# Altium PCB Universal JTAG Interface.PcbDoc
Units mm, origin at the board's own origin, x right, y up, seen from the top; angles counter-clockwise.
Board outline 60 x 39.3 mm, 2 copper layers (Top Layer, Bottom Layer); 81 components, 60 nets, 244 pads, 77 vias.
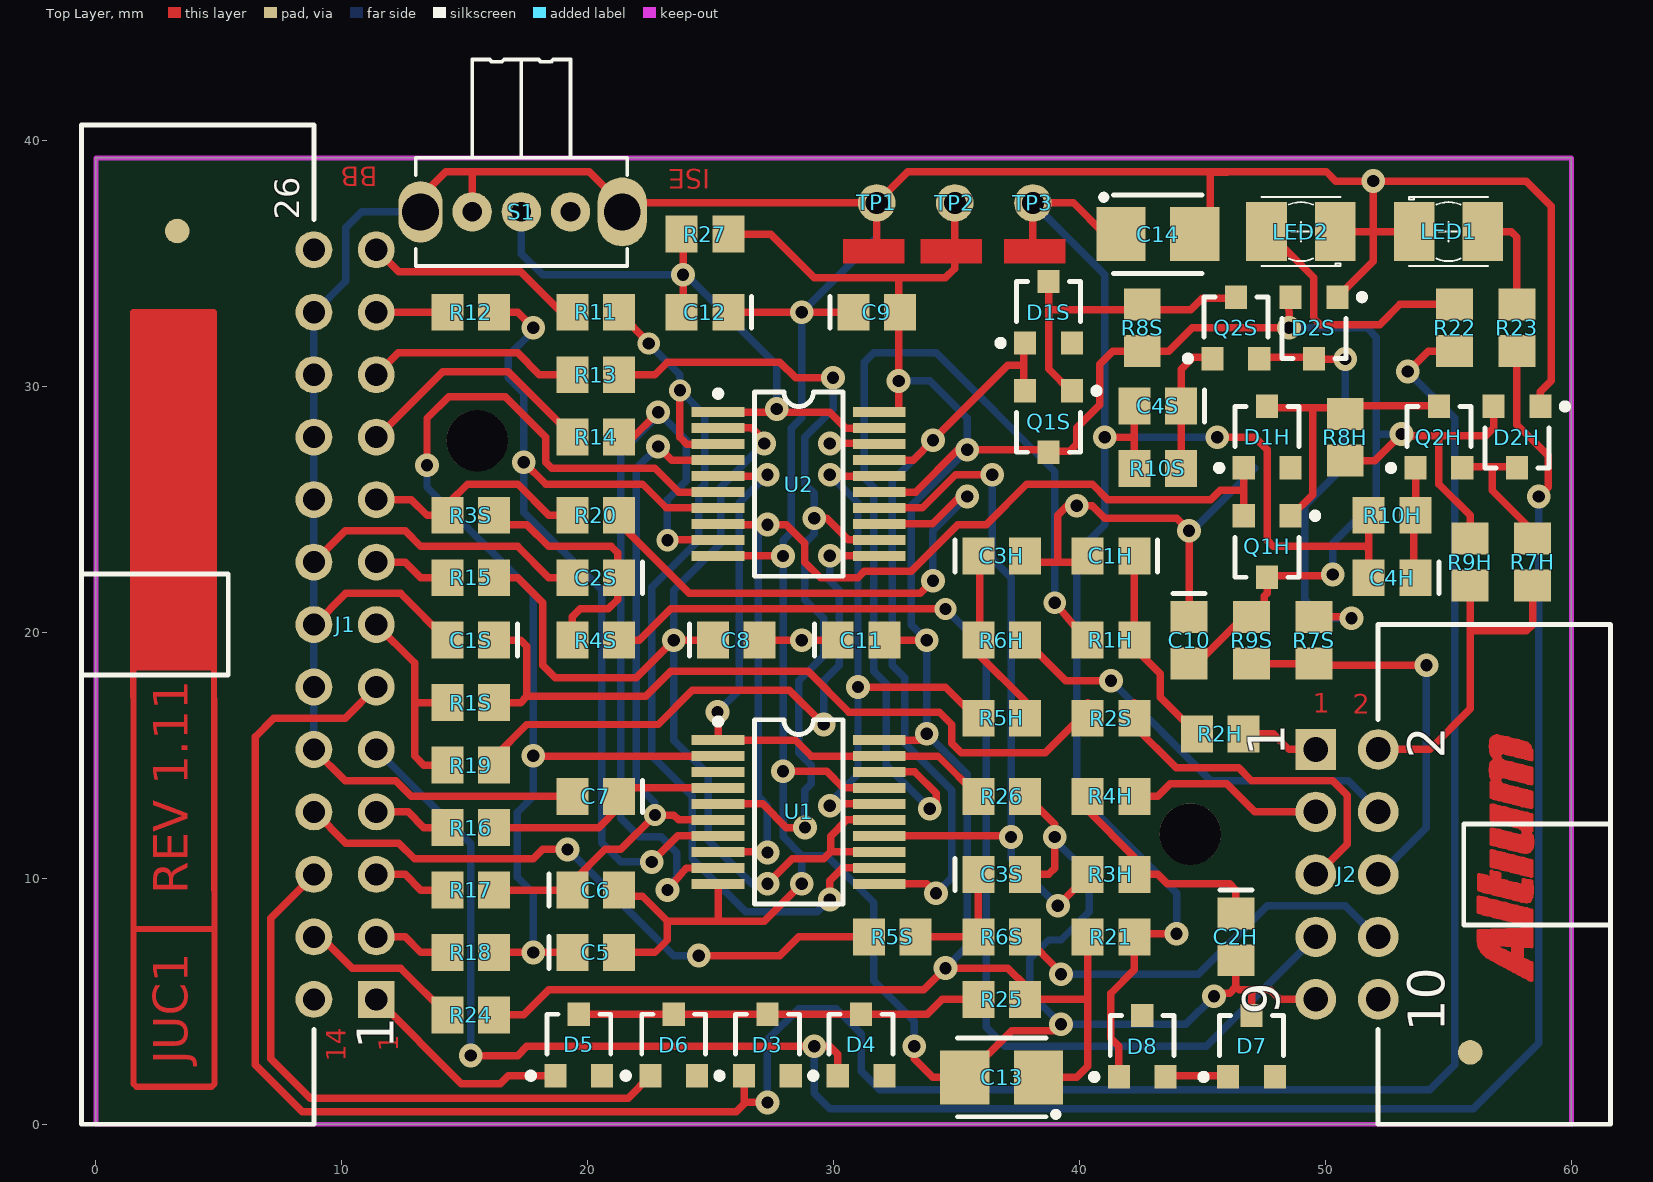
[diagram p0: Top Layer view]
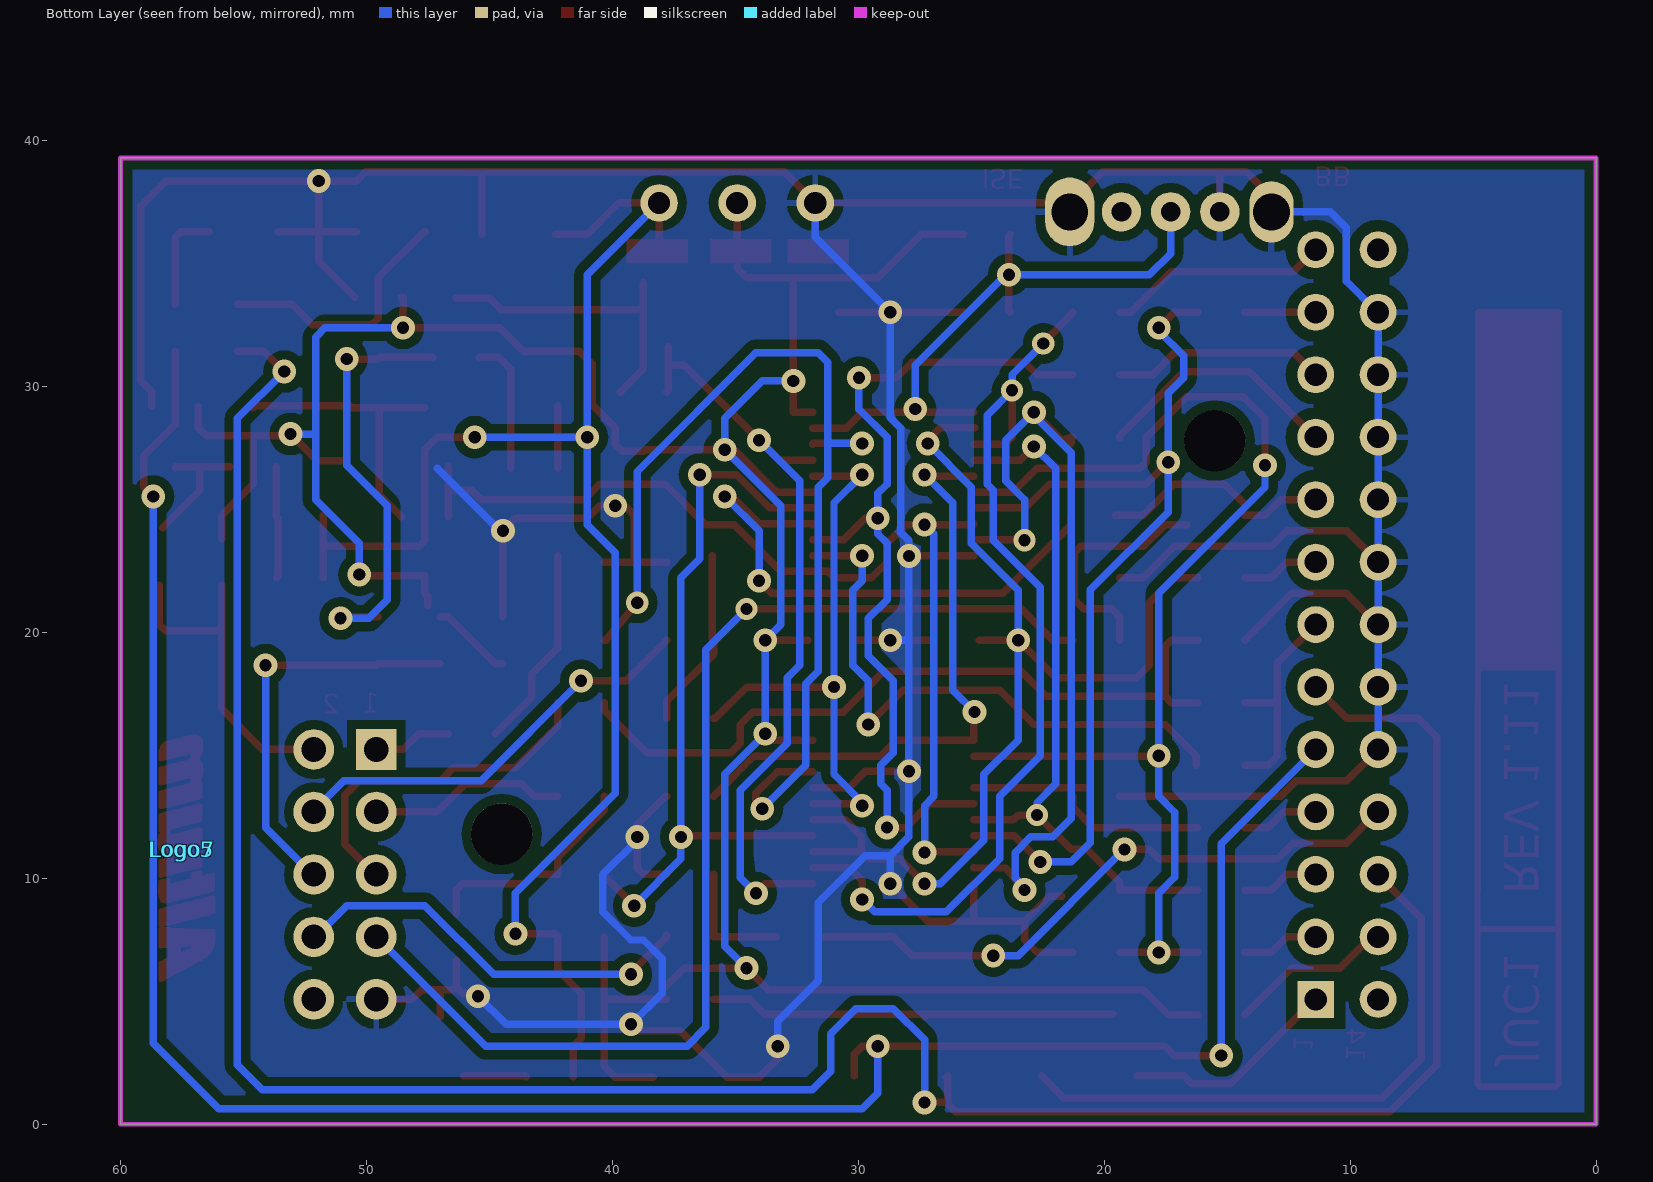
[diagram p1: Bottom Layer view, seen from below]

## Layer stack, top to bottom
Top Solder: solder mask 0.0102, Solder Resist, Dk 3.5
Top Layer: signal copper 0.0356
Dielectric1: dielectric 0.32, FR-4, Dk 4.8
Bottom Layer: signal copper 0.0356
Bottom Solder: solder mask 0.0102, Solder Resist, Dk 3.5

## Board outline
0,0 60,0 60,39.3 0,39.3

## Design rules (kind name [scope] priority, off if disabled: settings)
Clearance "Polygon Clearance" [InPolygon] p1: gap=0.381 ignorepadtopadclearanceinfootprint=FALSE except(0: Arc-Hole Track-Hole SMDPad-Hole THPad-Hole Via-Hole Fill-Hole Poly-Hole Region-Hole Text-Hole)
Clearance "Via-Via Clearance" [IsVia vs IsVia] p2: gap=0.3 ignorepadtopadclearanceinfootprint=FALSE except(0: Arc-Hole Track-Hole SMDPad-Hole THPad-Hole Via-Hole Fill-Hole Poly-Hole Region-Hole Text-Hole)
Clearance "Via-SMD Pad Clearance" [IsVia vs IsPad And OnTopLayer] p3: gap=0.254 ignorepadtopadclearanceinfootprint=FALSE except(0: Arc-Hole Track-Hole SMDPad-Hole THPad-Hole Via-Hole Fill-Hole Poly-Hole Region-Hole Text-Hole)
Clearance "Via-Pad Clearance" [IsVia vs IsPad] p4: gap=0.3 ignorepadtopadclearanceinfootprint=FALSE except(0: Arc-Hole Track-Hole SMDPad-Hole THPad-Hole Via-Hole Fill-Hole Poly-Hole Region-Hole Text-Hole)
Clearance "IC Pad-Pad Clearance" [HasFootprint('SOP65P780-20') vs HasFootprint('SOP65P780-20')] p5: gap=0.203 ignorepadtopadclearanceinfootprint=FALSE except(0: Arc-Hole Track-Hole SMDPad-Hole THPad-Hole Via-Hole Fill-Hole Poly-Hole Region-Hole Text-Hole)
Clearance "General Clearance" [All] p6: gap=0.254 ignorepadtopadclearanceinfootprint=FALSE except(0: Arc-Hole Track-Hole SMDPad-Hole THPad-Hole Via-Hole Fill-Hole Poly-Hole Region-Hole Text-Hole)
ComponentClearance ComponentClearance_General [Not InComponent('Logo5') && Not InComponent('Logo7') vs Not InComponent('Logo5') && Not InComponent('Logo7')] p1: gap=0.254 collisioncheckmode=3 verticalgap=0.254 showdistances=FALSE
ComponentClearance ComponentClearance_Default [All] p2 off: gap=0.254 collisioncheckmode=3 verticalgap=0.254 showdistances=FALSE
FabricationTestPointUsage TestPointUsage [All] p1 off: valid=0 allowmultiple=FALSE
FabricationTestpoint Testpoint [All] p1 off: side=3 testpointundercomponent=TRUE minsize=1.016 maxsize=2.54 preferedsize=1.524 minholesize=0 maxholesize=1.016 preferedholesize=0.813 testpointgrid=0.025 allowsidetop=TRUE allowsidebottom=TRUE usegrid=TRUE gridtolerance=0
HoleSize [All] p1: absolutevalues=TRUE maxlimit=3.2 minlimit=0.4 maxpercent=80.000 minpercent=20.000
PolygonConnect [All] p1: connectstyle=Relief reliefconductorwidth=0.254 reliefentries=4 polygonreliefangle="90 Angle" airgapwidth=0.254
RoutingVias [All] p1: holewidth=0.483 width=0.965 viastyle="Through Hole" minholewidth=0.3 minwidth=0.6 maxholewidth=0.711 maxwidth=1.27
SMDNeckDown [All] p1: percent=90.000
SilkToSolderMaskClearance SilkscreenOverComponentPads [IsPad] p1: minsilkscreentomaskgap=0.254 clearancetoexposedcopper=TRUE
SolderMaskExpansion [All] p1: expansion=0.102
Width "Logo Component Track Width" [InComponent('Logo5') Or InComponent('Logo7')] p1: maxlimit=2.54 minlimit=0.127 preferedwidth=0.254
Width "Polygon Width" [InPolygon] p2: maxlimit=0.508 minlimit=0.203 preferedwidth=0.254
Width [All] p3: maxlimit=1.27 minlimit=0.254 preferedwidth=0.305 minimp=50.000000 maximp=50.000000 favimp=50.000000
25 further rules are at their usual default settings.

## Classes and differential pairs
channel class "JTAG Interface": H S
component class S: C1S C2S C3S C4S D1S D2S Q1S Q2S R1S R2S R3S R4S R5S R6S R7S R8S R9S R10S
component class "Universal JTAG Interface": C5 C6 C7 C8 C9 C10 C11 C12 C13 C14 D3 D4 D5 D6 D7 D8 J1 J2 LED1 LED2 R11 R12 R13 R14 R15 R16 R17 R18 R19 R20 R21 R22 R23 R24 R25 R26 R27 S1 TP1 TP2 TP3 U1 U2
component class H: C1H C2H C3H C4H D1H D2H Q1H Q2H R1H R2H R3H R4H R5H R6H R7H R8H R9H R10H

## Components (designator, comment, footprint, x,y, rotation, side; value= is the part's Value field where it differs from the comment)
C1H "47pF 50V" CAPC2012 41.275,23.114 r180 top (schematic designator C1)
C1S "47pF 50V" CAPC2012 15.24,19.685 r180 top (schematic designator C1)
C2H "47pF 50V" CAPC2012 46.355,7.62 r270 top (schematic designator C2)
C2S "47pF 50V" CAPC2012 20.32,22.225 r180 top (schematic designator C2)
C3H "47pF 50V" CAPC2012 36.83,23.114 r0 top (schematic designator C3)
C3S "47pF 50V" CAPC2012 36.83,10.16 r0 top (schematic designator C3)
C4H "47pF 50V" CAPC2012 52.705,22.225 r180 top (schematic designator C4)
C4S "47pF 50V" CAPC2012 43.18,29.21 r180 top (schematic designator C4)
C5 "47pF 50V" CAPC2012 20.32,6.985 r0 top
C6 "47pF 50V" CAPC2012 20.32,9.525 r0 top
C7 "47pF 50V" CAPC2012 20.32,13.335 r180 top
C8 "47pF 50V" CAPC2012 26.035,19.685 r0 top
C9 "10nF 50V" CAPC2012 31.75,33.02 r0 top
C10 "10nF 50V" CAPC2012 44.45,19.685 r270 top
C11 "10nF 50V" CAPC2012 31.115,19.685 r0 top
C12 "10nF 50V" CAPC2012 24.765,33.02 r180 top
C13 "10uF 16V" CAPC3528 36.83,1.905 r180 top
C14 "10uF 16V" CAPC3528 43.18,36.195 r0 top
D1H "200mA 30V" SOT95P230-3 47.625,27.94 r0 top (schematic designator D1)
D1S "200mA 30V" SOT95P230-3 38.735,33.02 r0 top (schematic designator D1)
D2H "215mA 85V" SOT95P230-3 57.785,27.94 r180 top (schematic designator D2)
D2S "215mA 85V" SOT95P230-3 49.53,32.385 r180 top (schematic designator D2)
D3 "200mA 30V" SOT95P230-3 27.305,3.225 r0 top
D4 "200mA 30V" SOT95P230-3 31.115,3.225 r0 top
D5 "200mA 30V" SOT95P230-3 19.635,3.225 r0 top
D6 "200mA 30V" SOT95P230-3 23.495,3.225 r0 top
D7 "200mA 30V" SOT95P230-3 46.99,3.175 r0 top
D8 "215mA 85V" SOT95P230-3 42.545,3.175 r0 top
J1 "2x13 RA HEADER" HDR2X13_RA_CENTRONICS 8.86,20.32 r90 top locked
J2 "2x5 RA HEADER" 918510x323 52.14,10.16 r270 top locked
LED1 "ORANGE" LED3528 55,36.3 r180 top locked
LED2 "ORANGE" LED3528 49,36.3 r0 top
Logo5 "" "Altium Logo Small Bottom"#1 57.534,11.167 r270 bottom
Logo7 "" "Altium Logo Small Bottom"#2 57.495,11.167 r270 bottom
Q1H "TRAN-NPN-75V-40V-6V-SOT23" SOT95P230-3 47.625,23.495 r180 top (schematic designator Q1)
Q1S "TRAN-NPN-75V-40V-6V-SOT23" SOT95P230-3 38.735,28.575 r180 top (schematic designator Q1)
Q2H "TRAN-NPN-75V-40V-6V-SOT23" SOT95P230-3 54.61,27.94 r0 top (schematic designator Q2)
Q2S "TRAN-NPN-75V-40V-6V-SOT23" SOT95P230-3 46.355,32.385 r0 top (schematic designator Q2)
R1H "47R 5%" RESC2012 41.275,19.685 r0 top (schematic designator R1)
R1S "47R 5%" RESC2012 15.24,17.145 r0 top (schematic designator R1)
R2H "47R 5%" RESC2012 45.72,15.875 r0 top (schematic designator R2)
R2S "47R 5%" RESC2012 41.275,16.51 r0 top (schematic designator R2)
R3H "47R 5%" RESC2012 41.275,10.16 r0 top (schematic designator R3)
R3S "47R 5%" RESC2012 15.24,24.765 r0 top (schematic designator R3)
R4H "47R 5%" RESC2012 41.275,13.335 r0 top (schematic designator R4)
R4S "47R 5%" RESC2012 20.32,19.685 r0 top (schematic designator R4)
R5H "47R 5%" RESC2012 36.83,16.51 r0 top (schematic designator R5)
R5S "47R 5%" RESC2012 32.385,7.62 r0 top (schematic designator R5)
R6H "47R 5%" RESC2012 36.83,19.685 r0 top (schematic designator R6)
R6S "47R 5%" RESC2012 36.83,7.62 r0 top (schematic designator R6)
R7H "47R 5%" RESC2012 58.42,22.86 r90 top (schematic designator R7)
R7S "47R 5%" RESC2012 49.53,19.685 r90 top (schematic designator R7)
R8H "2K2 5%" RESC2012 50.8,27.94 r270 top (schematic designator R8)
R8S "2K2 5%" RESC2012 42.545,32.385 r270 top (schematic designator R8)
R9H "6K8 5%" RESC2012 55.88,22.86 r90 top (schematic designator R9)
R9S "6K8 5%" RESC2012 46.99,19.685 r90 top (schematic designator R9)
R10H "470R 5%" RESC2012 52.705,24.765 r0 top (schematic designator R10)
R10S "470R 5%" RESC2012 43.18,26.67 r0 top (schematic designator R10)
R11 "47R 5%" RESC2012 20.32,33.02 r180 top
R12 "47R 5%" RESC2012 15.24,33.02 r180 top
R13 "47R 5%" RESC2012 20.32,30.48 r180 top
R14 "47R 5%" RESC2012 20.32,27.94 r180 top
R15 "47R 5%" RESC2012 15.24,22.225 r180 top
R16 "47R 5%" RESC2012 15.24,12.065 r180 top
R17 "47R 5%" RESC2012 15.24,9.525 r180 top
R18 "47R 5%" RESC2012 15.24,6.985 r180 top
R19 "47R 5%" RESC2012 15.24,14.605 r0 top
R20 "47R 5%" RESC2012 20.32,24.765 r0 top
R21 "2K2 5%" RESC2012 41.275,7.62 r180 top
R22 "220R 5%" RESC2012 55.245,32.385 r270 top
R23 "220R 5%" RESC2012 57.785,32.385 r270 top
R24 "6K8 5%" RESC2012 15.24,4.445 r180 top
R25 "22R 5%" RESC2012 36.83,5.08 r180 top
R26 "47K 5%" RESC2012 36.83,13.335 r0 top
R27 "47K 5%" RESC2012 24.765,36.195 r180 top
S1 "SPDT SUB" OS102011MA1QN1 17.3,37.1 r180 top locked
TP1 "(GND)" TestPin 31.75,37.465 r0 top
TP2 "(VCC)" TestPin 34.925,37.465 r90 top
TP3 "(Vref)" TestPin 38.1,37.465 r90 top
U1 "SN74LVC244ADB" SOP65P780-20 28.575,12.7 r270 top
U2 "SN74LVC244ADB" SOP65P780-20 28.575,26.035 r270 top

## Footprints (in the part's own frame and the unit in brackets; to place one, negate y for a bottom-side part, rotate by r counter-clockwise, add the part's x,y. Pads: shape width x height; smd on the part's side, far side on the other; paste and mask are expansions set on the pad)
918510x323 [mm]
  rect 1.65x1.65 hole 1: 1(-5.08,-2.54)
  round 1.65 hole 1: 2(-5.08,0) 3(-2.54,-2.54) 4(-2.54,0) 5(0,-2.54) 6(0,0) 7(2.54,-2.54) 8(2.54,0) 9(5.08,-2.54) 10(5.08,0)
  silkscreen extent -10.16,0 10.16,9.45
"Altium Logo Small Bottom"#1 [mm]
  Bottom Layer drawing of 687 lines, arcs and shapes, not listed
"Altium Logo Small Bottom"#2 [mm]
CAPC2012 [mm]
  rect 1.3x1.5 smd: 1(-0.95,0) 2(0.95,0)
  silkscreen extent -1.9,-0.65 -1.9,0.65
CAPC3528 [mm]
  rect 2x2.2 smd: 1(-1.5,0) 2(1.5,0)
  silkscreen extent -2.3,-1.6 1.8,1.6
HDR2X13_RA_CENTRONICS [mm]
  rect 1.5x1.5 hole 0.9: 1(-15.24,-2.54)
  round 1.5 hole 0.9: 2(-12.7,-2.54) 3(-10.16,-2.54) 4(-7.62,-2.54) 5(-5.08,-2.54) 6(-2.54,-2.54) 7(0,-2.54) 8(2.54,-2.54) 9(5.08,-2.54) 10(7.62,-2.54) 11(10.16,-2.54) 12(12.7,-2.54) 13(15.24,-2.54) 14(-15.24,0) 15(-12.7,0) 16(-10.16,0) 17(-7.62,0) 18(-5.08,0) 19(-2.54,0) 20(0,0) 21(2.54,0) 22(5.08,0) 23(7.62,0) 24(10.16,0) 25(12.7,0) 26(15.24,0)
  silkscreen extent -20.32,0 20.32,9.45
LED3528 [mm]
  rect 1.65x2.41 smd: 1(-1.4,0) 2(1.4,0)
  silkscreen extent -1.6,-1.4 1.6,1.4
OS102011MA1QN1 [mm]
  round 1.6 hole 0.8: 1(-2,0) 2(0,0) 3(2,0)
  oval 2x2.8 / inner round 2 / far side oval 2x2.8 hole 1.5: M1(-4.1,0)
  oval 1.8x2.5 / inner oval 1.8x2 / far side oval 1.8x2.5 hole 1.5: M2(4.1,0)
  silkscreen extent -4.3,-6.2 4.3,2.2
RESC2012 [mm]
  rect 1.3x1.5 smd: 1(-0.95,0) 2(0.95,0)
SOP65P780-20 [mm]
  rect 0.4x2.15 smd: 1(-2.925,-3.275) 2(-2.275,-3.275) 3(-1.625,-3.275) 4(-0.975,-3.275) 5(-0.325,-3.275) 6(0.325,-3.275) 7(0.975,-3.275) 8(1.625,-3.275) 9(2.275,-3.275) 10(2.925,-3.275) 11(2.925,3.275) 12(2.275,3.275) 13(1.625,3.275) 14(0.975,3.275) 15(0.325,3.275) 16(-0.325,3.275) 17(-0.975,3.275) 18(-1.625,3.275) 19(-2.275,3.275) 20(-2.925,3.275)
  silkscreen extent -3.8,-3.4 3.75,1.8
SOT95P230-3 [mm]
  rect 0.9x0.95 smd: 1(-0.95,-1.25) 2(0.95,-1.25) 3(0,1.25)
  silkscreen extent -2.07,-1.37 1.3,1.25
TestPin [mil]
  round 60 hole 35.43: 1(0,0)

## Part data
C1H C1S C2H C2S C3H C3S C4H C4S C5 C6 C7 C8 C9 C10 C11 C12: "Capacitor"
  C1H C1S C2H C2S C3H C3S C4H C4S C5 C6 C7 C8: Design Item Id=CAP-NP-47pF-50V-0805
  C9 C10 C11 C12: Design Item Id=CAP-NP-10nF-50V-0805
C13 C14: "Polar Capacitor", Design Item Id=CAP-P-10uF-16V-MCCT-B
D1H D1S D3 D4 D5 D6 D7: "Schottky Barrier Single Diode", Design Item Id=DIO-SCHOTTKY-1S-SOT23
D2H D2S D8: "Silicon Switching Diode Array for High-Speed Switching", Design Item Id=DIO-2S-215mA-85V
J1: "Header, 13-Pin, Dual row", Design Item Id=CON-IDCHDRRA-2x13
J2: "Header, 5-Pin, Dual row, Right angle boxed", Design Item Id=CON-IDCHDRRA-2x5-2.54mm
LED1 LED2: "Typical GREEN SMD LED Agilent make", Design Item Id=LED-ORG-TLOU1102
Q1H Q1S Q2H Q2S: "General Purpose Transistor NPN Silicon", Design Item Id=TRAN-NPN-75V-40V-6V-SOT23
R1H R1S R2H R2S R3H R3S R4H R4S R5H R5S R6H R6S R7H R7S R8H R8S R9H R9S R10H R10S R11 R12 R13 R14 R15 R16 R17 R18 R19 R20 R21 R22 R23 R24 R25 R26 R27: "Resistor"
  R1H R1S R2H R2S R3H R3S R4H R4S R5H R5S R6H R6S R7H R7S R11 R12 R13 R14 R15 R16 R17 R18 R19 R20: Design Item Id=RES-47R-0805
  R8H R8S R21: Design Item Id=RES-2K2-0805
  R9H R9S R24: Design Item Id=RES-6K8-0805
  R10H R10S: Design Item Id=RES-470R-0805
  R22 R23: Design Item Id=RES-220R-0805
  R25: Design Item Id=RES-22R-0805
  R26 R27: Design Item Id=RES-47K-0805
S1: "SPDT Subminiature Toggle Switch", Design Item Id=SWI-SPDTSUB-OS102011MA1QN1
U1 U2: "Octal Buffer/Driver with 3-State Outputs", Design Item Id=SN74LVC244ADB
TP1 TP2 TP3: Design Item Id=TestPin

## Free pads (board coordinates)
  round 2.49 hole 2.5 unplated: 0(15.5,27.8) 1(44.5,11.8)
  round 1 smd mask+1.6: FID(3.302,36.322) FID(55.88,2.921)

## Via types
v1: diameter 0.965, hole 0.5, Top Layer to Bottom Layer, tented both sides, 71 vias
v2: diameter 0.9, hole 0.5, Top Layer to Bottom Layer, tented both sides, 6 vias

## Nets (pads, with @x,y where several pads share a name; then routed paths per layer and width w, separated by ;. In a path a pad name is that pad's centre, name@x,y a point inside that pad or via, vN(x,y) a via of type N, cw(c..) or ccw(c..) an arc to the next point about the centre after c; other vN are vias at no path point)
BB/I\S\E\: R26.1 U1.1 U1.19 U2.5 | length 25.2
  Top Layer w0.305: v1(25.273,16.764) 25.3,16.483 U1.1 28.444,15.625 29.094,14.975 34.24,14.975 R26.1 ; U2.5 27.249,26.36 v1(27.305,26.416)
  Bottom Layer w0.305: v1(25.273,16.764) 26.162,17.653 26.162,25.273 v1(27.305,26.416)
"COMPATIBILITY MODE": C12.2 R27.2 S1.2 U2.1 U2.19 | length 25.8
  Top Layer w0.305: C12.2 23.876,33.081 v1(23.876,34.544) 23.876,36.134 R27.2 ; U2.1 29.841,28.96 30.491,28.31 U2.19
  Bottom Layer w0.305: S1.2 17.3,35.405 18.161,34.544 v1(23.876,34.544) 24.003,34.544 27.686,30.861 v1(27.686,29.087)
GND: C1H.2 C1S.2 C2H.2 C2S.2 C3H.2 C3S.2 C5.2 C6.2 C7.2 C8.2 C9.1 C10.1 C11.1 C12.1 C13.2 C14.2 D2H.1 D2S.1 D7.3 J1.18 J1.19 J1.20 J1.21 J1.22 J1.23 J1.24 J1.25 J2.9 LED1.2 LED2.2 R26.2 S1.3 S1.M1 S1.M2 TP1.1 U1.10 U1.17 U2.10 | length 248
  Top Layer w0.305: J1.18 10.13,13.97 12.192,13.97 12.827,13.335 C7.2 ; J1.20 8.89,20.32 10.16,21.59 12.385,21.59 C1S.2 ; J1.21 10.13,24.13 12.573,24.13 13.208,23.495 17.145,23.495 18.415,22.225 C2S.2 ; S1.M2@13.208,37.719 14.224,38.735 15.367,38.735 ; S1.3 15.3,38.668 15.367,38.735 ; C5.2 22.733,6.985 23.241,7.493 23.241,8.255 ; S1.M1 21.4,37.401 20.066,38.735 15.367,38.735 ; C6.2@21.717,9.271 22.225,9.271 23.241,8.255 ; S1.M1@21.971,37.592 22.098,37.465 TP1.1 ; U1.10@25.296,9.779 U1.10 25.3,8.282 ; U2.10 v1(27.94,23.11) ; C12.1 v1(28.702,33.02) C9.1 ; C8.2 v1(28.702,19.685) C11.1 ; v1(27.94,14.351) 29.718,14.351 30.394,13.675 U1.17 ; v1@28.698,9.775 27.178,8.255 23.241,8.255 ; 31.75,35.687 TP1.1 ; v1(33.274,3.175) 33.274,2.667 34.036,1.905 C13.2 37.235,3.81 38.989,3.81 v1(39.243,4.064) ; C3S.2 38.735,10.16 38.989,10.414 v1(38.989,11.684) 38.989,12.192 37.846,13.335 R26.2 ; C3H.2@37.78,22.86 39.116,22.86 ; C1H.2@40.325,22.86 39.116,22.86 ; C10.1 v1(44.45,24.13) 43.942,24.638 41.021,24.638 40.513,25.146 v1(39.878,25.146) 39.497,25.146 39.116,24.765 39.116,22.86 ; C14.2@45.315,36.195 45.315,38.711 ; v1(45.466,5.207) 45.593,5.334 46.101,5.334 46.355,5.588 ; 45.998,38.711 45.315,38.711 ; C2H.2 46.355,5.588 ; D7.3@46.99,4.375 D7.3 46.99,5.461 ; J2.9 48.133,5.08 47.752,5.461 46.99,5.461 ; LED2.2 51.921,36.3 ; D2S.1 51.943,35.098 51.943,36.3 ; LED1.2 51.943,36.3 ; D2H.1 58.735,29.779 59.182,30.226 59.182,37.338 58.166,38.354 v1(51.943,38.354) ; TP1.1 33.02,38.735 45.339,38.735 ; 45.315,38.711 45.339,38.735 ; 45.339,38.735 50.038,38.735 50.419,38.354 v1(51.943,38.354) ; 46.355,5.588 46.482,5.461 46.99,5.461 ; 51.921,36.3 51.943,36.3 ; 51.921,36.3 51.943,36.322 ; 51.943,36.3 51.943,36.322 ; 51.943,36.322 v1(51.943,38.354)
  Bottom Layer w0.305: J1.18 J1.25 8.89,33.02 10.16,34.29 10.16,36.449 10.811,37.1 S1.M2 ; v1(28.702,9.779) 28.702,10.922 ; v1(28.702,19.685) 28.067,19.685 27.94,19.812 ; TP1.1 31.75,36.068 v1(28.702,33.02) 28.702,28.73 28.27,28.298 28.27,24.079 27.94,23.749 v1(27.94,23.11) 27.94,19.812 ; v1(33.274,3.175) 33.274,4.191 31.623,5.842 31.623,9.017 29.718,10.922 28.702,10.922 ; v1(38.989,11.684) 38.989,11.557 40.386,10.16 40.386,8.636 39.243,7.493 38.735,7.493 37.973,6.731 37.973,5.334 v1(39.243,4.064) 44.323,4.064 v1(45.466,5.207) ; v1(44.45,24.13) 44.577,24.13 47.117,26.67 ; v1@51.89,38.376 v1@51.9,38.4 ; 27.94,19.812 v1(27.94,14.351) 27.94,11.684 28.702,10.922
HARD-TCK: J2.3 R4H.2 | length 8.1
  Top Layer w0.305: R4H.2 43.18,13.335 43.688,13.843 45.974,13.843 47.117,12.7 J2.3
HARD-TDI: J2.1 R2H.2 | length 3.2
  Top Layer w0.305: R2H.2 47.879,15.875 48.514,15.24 J2.1
HARD-TDO: J2.2 R7H.1 R9H.1 | length 13.7
  Top Layer w0.305: J2.2 54.229,15.24 55.88,16.891 55.88,20.066 ; R9H.1 55.88,20.066 ; R7H.1 58.42,20.32 58.166,20.066 55.88,20.066
HARD-TMS: J2.4 R6H.2 | length 17.3
  Top Layer w0.305: R6H.2 39.431,18.034 v1(41.275,18.034)
  Bottom Layer w0.305: v1(41.275,18.034) 45.339,13.97 50.927,13.97 52.14,12.757 J2.4
HARD_TCK_IN: R3H.1 U1.14 U2.14 | length 30.9
  Top Layer w0.305: U1.14 v1@37.17,11.725 ; U2.14 33.597,25.06 34.953,26.416 v1(36.449,26.416) ; v1(39.116,8.89) 40.325,10.099 R3H.1
  Bottom Layer w0.305: v1(36.449,26.416) 36.449,22.987 37.211,22.225 v1(37.211,11.684) 37.211,10.795 v1(39.116,8.89)
HARD_TDI_IN: R1H.1 U1.18 U2.18 | length 43.4
  Top Layer w0.305: v1(29.845,27.686) 31.824,27.686 U2.18 ; U1.18 33.3,14.325 34.163,13.462 34.163,13.081 v1(33.909,12.827) ; v2(38.989,21.209) 40.259,19.685 R1H.1
  Bottom Layer w0.305: v1(29.845,27.686) 31.242,27.686 ; v1(33.909,12.827) 32.131,14.605 32.131,17.907 31.623,18.415 31.623,25.908 31.242,26.289 31.242,27.686 ; v2(38.989,21.209) 38.989,26.543 34.163,31.369 31.623,31.369 31.242,30.988 31.242,27.686
HARD_TDO_OUT: D1H.1 Q1H.2 U1.8 U2.8 | length 42.4
  Top Layer w0.305: U1.8 v1@27.279,11.075 ; U2.8 25.326,24.384 v1(27.305,24.384) 28.067,24.384 28.829,23.622 28.829,22.86 29.464,22.225 30.988,22.225 31.242,22.479 33.147,22.479 35.052,24.384 36.195,24.384 37.846,26.035 40.513,26.035 41.148,25.4 45.339,25.4 45.72,25.781 46.675,25.781 ; Q1H.2@46.675,24.695 46.675,25.781 ; D1H.1@46.675,26.74 46.675,25.781
  Bottom Layer w0.305: v1(27.305,11.049) 27.305,12.954 26.924,13.335 26.924,24.003 v1(27.305,24.384)
HARD_TMS_IN: R5H.1 U1.16 U2.16 | length 23.9
  Top Layer w0.305: v1(29.845,12.954) 29.916,13.025 U1.16 ; v1(29.845,26.416) 29.901,26.36 U2.16 ; v1(30.988,17.78) 34.544,17.78 35.814,16.51 R5H.1
  Bottom Layer w0.305: v1(29.845,12.954) 29.845,13.081 30.988,14.224 v1(30.988,17.78) 30.988,25.273 v1(29.845,26.416)
NetC1H_1: C1H.1 R1H.2 R2H.1 | length 8.3
  Top Layer w0.305: C1H.1 42.225,19.37 43.282,18.313 43.282,17.363 R2H.1
NetC1S_1: C1S.1 R1S.2 R2S.1 | length 31
  Top Layer w0.305: R1S.2 17.272,17.145 17.526,17.399 ; C1S.1 17.272,19.685 17.526,19.431 17.526,17.399 ; R2S.1@40.325,17.145 40.325,16.83 38.608,15.113 35.179,15.113 34.798,15.494 34.798,16.256 34.29,16.764 30.607,16.764 28.956,18.415 23.368,18.415 22.352,17.399 17.526,17.399
NetC2H_1: C2H.1 R3H.2 R4H.1 | length 9.3
  Top Layer w0.305: R4H.1 40.325,12.761 42.225,10.861 R3H.2 43.18,10.16 43.561,9.779 46.101,9.779 46.355,9.525 C2H.1
NetC2S_1: C2S.1 R3S.2 R4S.1 | length 10
  Top Layer w0.305: R3S.2@16.637,24.384 17.526,24.384 18.415,23.495 20.955,23.495 21.209,23.241 21.209,21.336 20.828,20.955 19.685,20.955 19.37,20.64 R4S.1
NetC3H_1: C3H.1 R5H.2 R6H.1 | length 7.4
  Top Layer w0.305: C3H.1@35.941,23.114 35.941,19.746 R6H.1 35.88,19.111 37.78,17.211 R5H.2
NetC3S_1: C3S.1 R5S.2 R6S.1 | length 5.1
  Top Layer w0.305: R5S.2 R6S.1 C3S.1
NetC4H_1: C4H.1 Q2H.1 R10H.2 | length 4.6
  Top Layer w0.305: C4H.1 53.594,22.286 53.594,24.638 53.66,24.704 Q2H.1@53.66,26.74
NetC4S_1: C4S.1 Q2S.1 R10S.2 | length 5.5
  Top Layer w0.305: R10S.2 44.13,30.693 44.622,31.185 Q2S.1@45.405,31.185
NetD1H_3: D1H.3 Q1H.1 Q2H.3 R8H.1 | length 11.9
  Top Layer w0.305: D1H.3@47.625,29.14 49.479,29.14 ; Q1H.1@48.575,24.695 49.479,25.599 49.479,29.14 ; Q2H.3@54.61,29.14 54.54,29.21 50.673,29.21 50.603,29.14 49.479,29.14
NetD1S_3: D1S.3 Q1S.1 Q2S.3 R8S.1 | length 12.7
  Top Layer w0.305: D1S.3@38.735,34.22 38.735,33.122 ; Q1S.1@39.685,29.775 38.735,30.725 38.735,33.122 ; Q2S.3@46.355,33.585 44.99,33.585 44.526,33.122 38.735,33.122
NetD2H_3: D2H.3 Q2H.2 R7H.2 | length 5.4
  Top Layer w0.305: Q2H.2@55.56,26.74 56.769,26.74 ; D2H.3 57.735,26.74 56.769,26.74 ; R7H.2@58.293,24.257 56.769,25.781 56.769,26.74
NetD2S_3: D2S.3 Q2S.2 R7S.2 | length 17.8
  Top Layer w0.305: Q2S.2@47.305,31.185 49.48,31.185 49.55,31.115 v1(50.8,31.115) ; R7S.2 50.993,20.635 v1(51.054,20.574)
  Bottom Layer w0.305: v1(50.8,31.115) 50.8,26.797 49.149,25.146 49.149,21.336 49.911,20.574 v1(51.054,20.574)
NetD3_3: D3.3 D4.3 D5.3 D6.3 R25.2 | length 16.5
  Top Layer w0.305: D5.3 D6.3 D3.3 D4.3 33.812,4.475 34.417,5.08 R25.2
NetD7_1: D7.1 D8.2 | length 2.6
  Top Layer w0.305: D8.2 43.545,1.975 D7.1@46.04,1.975
NetJ1_2: J1.2 R18.2 | length 3.2
  Top Layer w0.305: J1.2 12.573,7.62 13.208,6.985 R18.2
NetJ1_3: J1.3 R17.2 | length 3.2
  Top Layer w0.305: J1.3 12.573,10.16 13.208,9.525 R17.2
NetJ1_4: J1.4 R16.2 | length 3.2
  Top Layer w0.305: J1.4 12.7,12.7 13.335,12.065 R16.2
NetJ1_8: J1.8 R15.2 | length 3.2
  Top Layer w0.305: J1.8 12.573,22.86 13.208,22.225 R15.2
NetJ1_10: J1.10 R14.2 | length 10.2
  Top Layer w0.305: J1.10 11.43,27.94 14.097,30.607 16.764,30.607 19.37,28.001 R14.2
NetJ1_11: J1.11 R13.2 | length 8.7
  Top Layer w0.305: J1.11 12.289,31.369 17.145,31.369 18.034,30.48 R13.2
NetJ1_12: J1.12 R12.2 | length 2.9
  Top Layer w0.305: J1.12 R12.2
NetJ1_13: J1.13 R11.2 | length 9
  Top Layer w0.305: J1.13 11.43,35.56 12.319,34.671 17.272,34.671 18.923,33.02 R11.2
NetJ1_15: J1.15 R24.2 | length 6.7
  Top Layer w0.305: J1.15 9.144,7.62 10.414,6.35 12.385,6.35 R24.2
NetLED1_1: LED1.1 R23.1 | length 4.2
  Top Layer w0.305: LED1.1 57.553,36.3 57.785,36.068 R23.1
NetLED2_1: LED2.1 R22.1 | length 10.5
  Top Layer w0.305: LED2.1 47.647,36.3 49.53,34.417 49.53,32.766 49.784,32.512 52.197,32.512 53.02,33.335 R22.1
NetR19_2: R19.2 U2.11 | length 24.7
  Top Layer w0.305: R19.2@16.256,14.605 16.256,14.986 17.526,16.256 22.86,16.256 24.257,17.653 28.194,17.653 v1(29.591,16.256) ; v1(29.845,23.114) 30.095,23.11 U2.11
  Bottom Layer w0.305: v1(29.591,16.256) 29.591,18.034 30.226,18.669 30.226,21.717 29.845,22.098 v1(29.845,23.114)
NetR20_2: R20.2 U2.13 | length 22.5
  Top Layer w0.305: R20.2@21.336,24.765 21.336,24.384 24.13,21.59 33.528,21.59 v1(34.036,22.098) ; U2.13@31.876,24.384 U2.13 34.01,24.41 35.127,25.527 v1(35.433,25.527)
  Bottom Layer w0.305: v1(34.036,22.098) 34.036,24.13 v1(35.433,25.527)
PP_02_D0_OUT: C5.1 R18.1 U1.2 U2.6 | length 49.1
  Top Layer w0.305: v1(13.462,26.797) 13.462,28.702 14.351,29.591 16.637,29.591 18.288,27.94 18.288,26.924 18.542,26.67 22.733,26.67 23.693,25.71 U2.6 ; R18.1 v1(17.78,6.985) C5.1 ; v1(17.78,14.986) 17.791,14.975 U1.2
  Bottom Layer w0.305: v1(13.462,26.797) 13.462,25.908 17.78,21.59 v1(17.78,14.986) 17.78,13.335 17.142,12.697 17.142,10.036 17.78,9.398 v1(17.78,6.985)
PP_03_D1_OUT: C6.1 R17.1 U1.6 U2.4 | length 29
  Top Layer w0.305: R17.1 C6.1 19.37,9.845 20.701,11.176 21.336,11.176 v2(22.733,12.573) 23.495,12.573 23.693,12.375 U1.6 ; v1(22.86,27.559) 23.409,27.01 U2.4
  Bottom Layer w0.305: v2(22.733,12.573) 22.733,13.081 21.971,13.843 21.971,26.67 v1(22.86,27.559)
PP_04_D2_OUT: C7.1 R16.1 U1.4 | length 10.4
  Top Layer w0.305: R16.1 20.447,12.065 21.27,12.888 C7.1 ; C7.1@20.787,13.675 U1.4
PP_05_D3_OUT: D4.1 J1.5 R23.2 | length 91.7
  Top Layer w0.305: v1(15.24,2.794) 17.145,2.794 17.526,3.175 v1(29.21,3.175) 29.845,3.175 30.165,2.855 D4.1 ; R23.2 57.785,28.448 59.055,27.178 59.055,25.908 v1(58.674,25.527)
  Bottom Layer w0.305: J1.5 15.24,11.4 v1(15.24,2.794) ; v1(29.21,3.175) 29.21,1.27 29.845,0.635 56.007,0.635 58.674,3.302 v1(58.674,25.527)
PP_06_D4_OUT: D3.1 J1.6 R22.2 | length 107
  Top Layer w0.305: J1.6 10.13,16.51 7.239,16.51 6.477,15.748 6.477,2.413 8.382,0.508 26.035,0.508 26.355,0.828 ; D3.1@26.416,1.914 D3.1 26.355,0.828 ; v1(27.305,0.889) 26.416,0.889 26.355,0.828 ; v1(53.34,30.607) 54.168,31.435 R22.2
  Bottom Layer w0.305: v1(27.305,0.889) 27.305,3.429 28.575,4.699 30.099,4.699 31.115,3.683 31.115,2.159 31.877,1.397 54.229,1.397 55.245,2.413 55.245,28.702 v1(53.34,30.607)
PP_07_D5_OUT: J1.7 R1S.1 R19.1 | length 8.8
  Top Layer w0.305: J1.7 12.954,18.766 12.954,17.145 ; R19.1 13.335,14.605 12.954,14.986 12.954,17.145 ; R1S.1 12.954,17.145
PP_08_D6_OUT: C8.1 R15.1 U1.13 U1.15 U2.2 | length 44.3
  Top Layer w0.305: R15.1 17.145,22.225 18.161,21.209 18.161,18.669 18.669,18.161 21.971,18.161 v1(23.495,19.685) C8.1 ; U2.2@25.273,28.321 26.67,28.321 27.178,27.813 v1(27.178,27.686) ; v1(27.305,9.779) 28.321,10.795 29.591,10.795 29.871,11.075 ; U1.13 29.871,11.075 ; U1.15 30.536,12.375 29.871,11.71 29.871,11.075
  Bottom Layer w0.305: v1(27.178,27.686) 25.4,25.908 25.4,23.622 23.495,21.717 v1(23.495,19.685) 23.495,15.621 24.892,14.224 24.892,11.557 26.67,9.779 v1(27.305,9.779)
PP_09_D7_OUT: J1.9 R3S.1 R20.1 | length 9.2
  Top Layer w0.305: J1.9 12.827,25.4 13.462,24.765 R3S.1 ; R3S.1@14.351,25.273 15.113,26.035 17.145,26.035 18.415,24.765 R20.1@19.558,24.765
PP_10_ACK_IN: R14.1 U1.9 U2.9 | length 34.4
  Top Layer w0.305: R14.1 R14.1@21.336,27.94 ; R14.1@21.336,27.686 R14.1@21.336,27.94 ; v1(22.86,28.956) 21.717,27.813 R14.1@21.336,27.94 ; v1(23.241,9.525) 24.003,10.414 U1.9 ; v2@23.379,23.76 U2.9
  Bottom Layer w0.305: v1(23.241,9.525) 23.241,9.652 23.622,10.033 23.622,11.049 22.987,11.684 22.098,11.684 21.336,12.446 21.336,27.305 22.86,28.829 v1(22.86,28.956) 24.003,27.813 24.003,26.162 23.241,25.4 v2(23.241,23.749)
PP_11_BSY_IN: R13.1 U1.5 U2.12 | length 36.2
  Top Layer w0.305: R13.1 22.733,30.48 23.241,30.988 27.813,30.988 28.448,30.353 v1(29.972,30.353) ; U1.5 27.107,13.025 28.067,12.065 v1(28.829,12.065) ; v1(29.21,24.638) 29.718,24.638 30.596,23.76 U2.12
  Bottom Layer w0.305: v1(28.829,12.065) 28.829,13.589 29.083,13.843 29.083,14.605 28.575,15.113 28.575,18.034 29.591,19.05 29.591,20.574 28.829,21.336 28.829,23.622 29.21,24.003 v1(29.21,24.638) 29.21,25.654 28.829,26.035 28.829,27.94 29.972,29.083 v1(29.972,30.353)
PP_12_PE_IN: R12.1 U1.7 U2.7 | length 39
  Top Layer w0.305: R12.1 17.145,33.02 v1(17.78,32.385) ; v1(17.399,26.924) 18.288,26.035 22.225,26.035 23.2,25.06 U2.7 ; v1(22.606,10.668) 23.663,11.725 U1.7
  Bottom Layer w0.305: v1(17.78,32.385) 17.78,32.258 16.764,31.242 16.764,30.353 17.399,29.718 v1(17.399,26.924) 17.399,24.892 20.56,21.731 20.56,11.444 21.336,10.668 v1(22.606,10.668)
PP_13_SEL_IN: R11.1 U1.12 U2.3 | length 38.5
  Top Layer w0.305: R11.1 v2@22.484,31.755 ; v2@24.003,29.718 23.749,29.464 23.749,27.94 24.029,27.66 U2.3 ; v1(29.845,9.144) 29.845,9.906 30.364,10.425 U1.12
  Bottom Layer w0.305: v2@22.484,31.755 22.484,31.745 23.749,30.48 v2(23.749,29.845) 24.765,28.829 24.765,26.035 24.511,25.781 24.511,23.749 22.606,21.844 22.606,14.986 24.257,13.335 24.257,10.795 26.416,8.636 29.337,8.636 v1(29.845,9.144)
  other v2: 22.479,31.75
PP_INIT: D6.1 J1.16 | length 24.7
  Top Layer w0.305: J1.16 8.86,10.13 7.112,8.382 7.112,2.667 8.712,1.067 21.637,1.067 D6.1
PP_SOFT_TMS: J1.17 R5S.1 | length 25.6
  Top Layer w0.305: J1.17 8.89,12.7 10.16,11.43 12.319,11.43 12.954,10.795 17.78,10.795 18.161,11.176 v1(19.177,11.176) ; v1(24.511,6.858) 27.813,6.858 28.575,7.62 R5S.1
  Bottom Layer w0.305: v1(19.177,11.176) 23.495,6.858 v1(24.511,6.858)
PP_STROBE: D5.1 J1.1 | length 8.8
  Top Layer w0.305: J1.1 11.43,5.08 14.859,1.651 16.44,1.651 16.764,1.975 D5.1
SOFT-TCK: J2.7 R4S.2 | length 47.1
  Top Layer w0.305: R4S.2 22.098,19.685 23.368,20.955 v2(34.544,20.955)
  Bottom Layer w0.305: v2(34.544,20.955) 36.195,19.304 36.195,3.937 36.957,3.175 45.155,3.175 J2.7
SOFT-TDI: J2.5 R2S.2 | length 14.5
  Top Layer w0.305: R2S.2@42.225,17.145 42.225,16.195 43.925,14.495 46.465,14.495 46.99,13.97 50.292,13.97 50.876,13.386 50.876,11.379 J2.5@49.657,10.16
SOFT-TDO: J2.6 R7S.1 R9S.1 | length 16.6
  Top Layer w0.305: R9S.1 R7S.1 49.596,18.669 v1(54.102,18.669) ; J2.6 J2.6@52.197,10.16
  Bottom Layer w0.305: J2.6 52.197,10.16 54.102,12.065 v1(54.102,18.669)
SOFT-TMS: J2.8 R6S.2 | length 16.8
  Top Layer w0.305: R6S.2@37.78,7.681 R6S.2 39.243,6.157 v1(39.243,6.096)
  Bottom Layer w0.305: v1(39.243,6.096) 44.831,6.096 47.625,8.89 50.8,8.89 52.07,7.62 J2.8
SOFT_TDO_OUT: D1S.1 Q1S.2 U1.11 U2.17 | length 32.2
  Top Layer w0.305: U1.11 33.786,9.775 v1(34.163,9.398) ; U2.17 33.233,27.01 v1(34.036,27.813) 37.084,30.861 37.719,30.861 ; D1S.1@37.719,31.623 37.719,30.861 ; Q1S.2@37.785,29.775 37.719,29.841 37.719,30.861
  Bottom Layer w0.305: v1(34.036,27.813) 32.385,26.162 32.385,18.669 32.893,18.161 32.893,15.494 34.798,13.589 34.798,10.033 v1(34.163,9.398)
VCC: C9.2 C10.2 C11.2 C13.1 D2H.2 D2S.2 Q1H.3 Q1S.3 R8H.2 R8S.2 R9H.2 R9S.2 R21.2 R24.1 R25.1 R27.1 TP2.1 U1.20 U2.15 U2.20 | length 140.2
  Top Layer w0.305: R24.1 17.399,4.445 18.415,5.461 33.655,5.461 v1(34.544,6.35) 37.084,6.35 R25.1@37.846,5.588 ; R27.1 27.432,36.195 29.21,34.417 32.639,34.417 ; U1.20 33.532,15.625 v1(33.782,15.875) ; U2.15 33.33,25.71 35.052,27.432 v1(35.433,27.432) 38.678,27.432 38.735,27.375 39.592,27.375 39.878,27.661 39.878,28.321 40.818,29.261 40.818,30.912 41.341,31.435 R8S.2 ; U2.20 U2.20@32.639,28.96 ; C11.2 v1(33.782,19.685) ; U2.20@32.639,28.956 U2.20@32.639,28.96 ; 34.925,35.56 34.925,34.798 34.544,34.417 32.639,34.417 ; 34.925,35.814 TP2.1 ; R25.1 40.325,5.08 ; C13.1 39.878,1.905 40.325,2.352 40.325,5.08 ; R21.2 40.325,5.08 ; R8S.2@42.555,31.445 R8S.2 ; C10.2 44.77,18.735 46.67,20.635 R9S.2 ; R9S.2@47.498,21.082 47.498,21.463 47.625,21.59 Q1H.3 47.625,22.295 50.235,22.295 v1(50.292,22.352) ; D2S.2 48.494,33.635 48.494,33.634 48.514,32.512 v1(48.514,32.385) 44.577,32.385 43.627,31.435 R8S.2 ; R8H.2 52.009,26.99 53.02,28.001 54.61,28.001 ; R9H.2 55.88,24.765 54.61,26.035 54.61,28.001 ; D2H.2 56.835,28.321 56.515,28.001 54.61,28.001 ; U2.20@32.639,28.96 v1(32.639,30.226) 32.639,34.417
  Bottom Layer w0.305: v1(32.639,30.226) 33.909,30.226 35.433,28.702 v1(35.433,27.432) 33.147,25.146 33.147,20.32 v1(33.782,19.685) ; v1@33.782,19.812 v1(33.782,19.685) ; v1(34.544,6.35) 35.433,7.239 35.433,14.224 v1(33.782,15.875) v1(33.782,19.685) ; v1(48.514,32.385) 51.689,32.385 52.07,32.004 52.07,28.067 ; v1(50.292,22.352) 50.292,23.622 52.07,25.4 52.07,28.067 ; v1(53.086,28.067) 52.07,28.067
VREF: C4H.2 C4S.2 C14.1 D8.1 R10H.1 R10S.1 R21.1 TP3.1 | length 68.8
  Top Layer w0.305: 38.1,35.56 TP3.1 39.751,37.465 41.021,36.195 C14.1@42.315,36.195 ; v1(41.021,27.94) 42.23,27.94 ; D8.1 41.595,3.175 41.275,3.495 41.275,5.334 42.225,6.284 R21.1 42.352,7.747 v1(43.942,7.747) ; R10S.1 42.23,27.94 ; C4S.2 42.23,27.94 ; v1(45.593,27.94) 47.117,27.94 47.625,27.432 47.625,23.749 47.879,23.495 51.628,23.495 51.755,23.368 ; C4H.2 51.755,23.368 ; R10H.1 51.755,23.368
  Bottom Layer w0.305: TP3.1 41.021,34.544 v1(41.021,27.94) ; v1(43.942,7.747) 43.942,9.398 39.878,13.462 39.878,23.241 41.021,24.384 v1(41.021,27.94) ; v1(45.593,27.94) v1(41.021,27.94)
pads on no net: D1H.2 D1S.2 D3.2 D4.2 D5.2 D6.2 D7.2 D8.3 J1.14 J1.26 J2.10 S1.1 U1.3
copper on no net: | length 72.7
  Top Layer w0.254: 1.524,7.945 4.826,7.945 ; 1.515,33.02 1.524,1.651 1.651,1.524 4.699,1.524 4.826,1.651 4.79,33.02 1.515,33.02

## Polygon pours and split planes (outlines as drawn)
GND on Bottom Layer "Bottom Layer-GND" (solid, remove dead copper, pour order 1000): -1.016,40.132 60.833,40.132 60.833,-0.889 -1.016,-0.889

## Keep-outs
Keep-Out Layer:
  the board outline again, w0.2

## Other copper
Top Layer:
  rectangle net VREF: 36.932,35.007 39.432,36.007
  rectangle net VCC: 33.528,35.007 36.028,36.007
  rectangle net GND: 30.378,35.007 32.878,36.007
  region: 1.515,33.02 1.515,18.445 4.79,18.445 4.79,33.02
  text "BB" at 11.452,38.928 h0.8 r180
  text "ISE" at 24.979,38.828 h0.8 r180
  text "1" at 49.489,16.728 h0.8
  text "2" at 51.1,16.7 h0.8
  text "REV 1.11" at 3.728,9.345 h1.4 r90
  text "1" at 12.286,2.946 h0.8 r90
  text "14" at 10.16,2.54 h0.8 r90
  text "JUC1" at 3.728,2.445 h1.4 r90
Bottom Layer:
  pour cut-out: 8.4,34.5 9.3,34.5 9.3,34.1 8.4,34.1
  pour cut-out: 8.4,14.2 9.3,14.2 9.3,13.8 8.4,13.8

## Silkscreen, mask and mechanical layers (free items; w line width, h text height)
Top Solder:
  region: 1.378,33.147 1.378,18.445 4.978,18.445 4.978,33.147
  lines w0.597: 1.678,1.461 1.524,1.615 1.524,33.02 4.7,33 4.7,32.83 4.765,32.765 4.765,1.501
  lines w0.6: 1.653,7.945 4.638,7.945 ; 4.638,29.466 1.653,29.466 1.653,16.684 1.653,1.486 1.678,1.461 4.678,1.461 4.765,1.501
  text "BB" at 11.452,38.928 h0.8 r180
  text "ISE" at 24.979,38.828 h0.8 r180
  text "TP1" at 30.69,35.088 h0.8
  text "TP2" at 33.753,35.088 h0.8
  text "TP3" at 37.13,35.088 h0.8
  text "1" at 49.489,16.728 h0.8
  text "2" at 51.1,16.7 h0.8
  text "REV 1.11" at 3.728,9.345 h1.4 r90
  text "1" at 12.286,2.946 h0.8 r90
  text "9" at 49,2.8 h0.8
  text "10" at 50.647,2.779 h0.8
  text "14" at 10.16,2.54 h0.8 r90
  text "JUC1" at 3.728,2.445 h1.4 r90
PCB Boundary:
  the board outline again, w0.1
  text "PCB boundary coincides with centre-line of tracks" at 4.953,-11.873 h0.75
Gerber ID:
  text ".Layer_Name" at 4.953,-5.873 h0.75
Printout ID:
  text ".Printout_Name" at 4.953,-9.873 h0.75
Dimensions:
  lines w0.1: -1.5,0.5 -1.5,0 -1,0 ; 62,0 62.5,0 62.5,0.5
  lines w0.254: -5.008,1.524 -4.5,0 ; -5.008,37.776 -4.5,39.3 ; -4.754,0 -4.246,0 ; -4.754,39.3 -4.246,39.3 ; -4.5,13.15 -4.5,0 ; -4.5,26.15 -4.5,39.3 ; -3.992,1.524 -4.5,0 ; -3.992,37.776 -4.5,39.3 ; 0,-2.254 0,-1.746 ; 1.524,-2.508 0,-2 ; 1.524,-1.492 0,-2 ; 24.896,-2 0,-2 ; 35.104,-2 60,-2 ; 58.476,-2.508 60,-2 ; 58.476,-1.492 60,-2 ; 60,-2.254 60,-1.746
  text "39.3 (mm)" at -3.586,13.404 h1.52 r90
  text "60 (mm)" at 25.15,-2.914 h1.52
Design Information:
  drawing of 719 lines, arcs and shapes, not listed
  text "JUC1 REV 1.11" at 322.58,252.968 h1.27
  text "DESIGN INFORMATION" at 266.573,252.841 h1.52
  text "BOARD NAME:" at 304.165,252.841 h1.52
  text "BOARD TECHNOLOGY" at 266.573,250.301 h1.52
  text "BOARD SIZE (REFER ALSO PROFILING INFORMATION)" at 314.833,250.301 h1.27
  text "60.0mm" at 317.553,248.027 h1.52
  text "15.748" at 282.372,247.939 h1.52
  text "39.3mm" at 340.553,247.927 h1.52
  text "7.874" at 296.342,247.812 h1.52
  text "5" at 269.399,247.761 h1.52
  text "X" at 333.502,247.253 h1.78
  text "(MIN. TRACK/   PADS  /   CLEARANCE     IN 0.001'')" at 265.049,245.221 h1.27
  text "MINIMUM ANNULAR RING 0.05MM (0.002'') EXTERNAL PER IPC-2221 CLASS 3 LEVEL C AND IS THE" at 266.573,242.681 h1.27
  text "MANUFACTURING REGISTRATION ALLOWANCE" at 266.573,240.395 h1.27
  text "LAND SIZE CALCULATION MINIMUM - NOMINAL HOLE SIZE + 0.508MM (0.020'')" at 266.573,237.601 h1.27
  text "AS INSTRUCTED" at 352.603,233.207 h1.52
  text "X" at 304.216,233.08 h1.52
  text "CIRCUIT TYPE:" at 266.573,233.029 h1.52
  text "SS" at 289.433,233.029 h1.27
  text "DS" at 307.213,233.029 h1.27
  text "X" at 321.818,233.029 h1.52
  text "PTH" at 324.993,233.029 h1.27
  text "ML" at 335.915,233.029 h1.27
  text "No. OFF" at 342.773,233.029 h1.27
  text "FINGER CONNECTOR DIM PER:" at 266.573,229.981 h1.52
  text "AS SHOWN" at 342.773,229.981 h1.27
  text "No. OFF TOTAL" at 283.337,227.187 h1.52
  text "ONE SIDE" at 324.993,227.187 h1.27
  text "BOTH SIDES" at 342.773,226.933 h1.27
  text "VIAS:" at 266.573,224.266 h1.52
  text "NONE" at 278.003,224.266 h1.14
  text "X" at 286.385,224.266 h1.52
  text "FEED THRU'" at 289.433,224.266 h1.14
  text "X" at 304.165,224.266 h1.52
  text "TENTED" at 307.213,224.266 h1.14
  text "BURIED LAYER SEQUENCE" at 324.993,224.266 h1.14
  text "UNIQUE DRILL" at 289.433,221.218 h1.14
  text "2 SIZE" at 307.213,221.218 h1.14
  text "BLIND LAYER SEQUENCE" at 324.993,221.218 h1.14
  text "Layer Stack Manager (Protel)" at 302.006,218.932 h1.27
  text "X" at 339.725,218.932 h1.52
  text "AS SHOWN" at 342.773,218.932 h1.27
  text "LAYER CONSTRUCTION PER:" at 266.573,218.805 h1.52
  text "Protel" at 347.599,216.265 h1.27
  text "(PFW)" at 357.886,216.138 h1.27
  text "ARTWORK:" at 266.573,216.011 h1.52
  text "MANUAL" at 289.433,216.011 h1.27
  text "DIGITISED" at 307.213,216.011 h1.27
  text "X" at 321.945,216.011 h1.52
  text "CAD" at 324.993,216.011 h1.27
  text "TYPE" at 335.915,216.011 h1.27
  text "ARTWORK/PATTERN MASTER LIST" at 266.573,211.312 h1.52
  text "DESCRIPTION" at 267.843,208.899 h1.27
  text "DRAWING No./CAD FILE REF." at 286.512,208.899 h1.27
  text "LAYER NAME" at 327.787,208.899 h1.27
  text "GERBER FILE REF" at 348.539,208.823 h1.27
  text "PCB FILE" at 266.319,206.359 h1.27
  text "JTAG_Interface" at 286.69,206.283 h1.27
  text "PcbDoc" at 317.932,206.283 h1.02
  text "Top Paste Mask" at 326.111,203.819 h1.02
  text "GTP" at 368.732,203.743 h1.27
  text "GERBER FILE" at 266.319,203.692 h1.27
  text "Top Solder Mask" at 326.111,201.33 h1.02
  text "GTS" at 368.732,201.203 h1.27
  text "GERBER FILE" at 266.319,201.152 h1.27
  text "TOP LAYER" at 326.111,198.739 h1.02
  text "GTL" at 368.732,198.663 h1.27
  text "GERBER FILE" at 266.319,198.612 h1.27
  text "BOTTOMLAYER" at 326.111,196.199 h1.02
  text "GBL" at 368.732,196.123 h1.27
  text "GERBER FILE" at 266.319,196.072 h1.27
  text "Bottom Solder Mask" at 326.111,193.71 h1.02
  text "GBS" at 368.732,193.583 h1.27
  text "GERBER FILE" at 266.319,193.532 h1.27
  text "PCB Boundary" at 326.111,191.119 h1.02
  text "GM1" at 368.732,191.043 h1.27
  text "GERBER FILE" at 266.319,190.992 h1.27
  text "APERTURE LIST" at 266.319,188.579 h1.27
  text "APR" at 318.932,188.503 h1.27
  text "DRILL REPORT" at 266.319,186.039 h1.27
  text "DRR" at 318.932,185.963 h1.27
  text "EXCELLON DRILL" at 266.319,183.499 h1.27
  text "TXT" at 318.932,183.423 h1.27
  text "MATERIAL:" at 266.573,150.225 h1.52
  text "GLASS FIBRE EPOXY RESIN NEMA GRADE FR4 (MIL-S-13949H)" at 292.227,149.971 h1.27
  text "X" at 289.56,149.844 h1.52
  text "THICKNESS:" at 274.447,147.05 h1.27
  text "0.8mm" at 292.227,147.05 h1.27
  text "1.2mm" at 309.88,147.05 h1.27
  text "1.6mm" at 327.533,147.05 h1.27
  text "2.4mm" at 345.313,147.05 h1.27
  text "3.2mm" at 363.093,147.05 h1.27
  text "X" at 325.12,146.923 h1.52
  text "TOLERANCE:" at 274.32,144.002 h1.27
  text "IN A/W IPC-D-300G CLASS" at 291.973,144.002 h1.27
  text "3 LEVEL B" at 326.898,144.002 h1.27
  text "OTHER +/-" at 345.313,144.002 h1.27
  text "X" at 289.56,143.875 h1.52
  text "BOW & TWIST:" at 271.907,140.954 h1.27
  text "IN A/W IPC-D-300G CLASS" at 291.973,140.954 h1.27
  text "3 LEVEL B" at 326.898,140.954 h1.27
  text "AS SHOWN" at 345.44,140.827 h1.27
  text "X" at 289.56,140.7 h1.52
  text "COPPER THICKNESS (FINISHED)" at 274.32,137.652 h1.27
  text "OUTER:" at 279.146,135.366 h1.27
  text "18um" at 292.227,135.366 h1.27
  text "35um" at 319.278,135.366 h1.27
  text "70um" at 345.567,135.366 h1.27
  text "X" at 316.535,135.163 h1.52
  text "INNER SIGNAL:" at 270.764,132.318 h1.27
  text "18um" at 292.227,132.318 h1.27
  text "35um" at 319.278,132.318 h1.27
  text "70um" at 345.567,132.318 h1.27
  text "INNER PWR:" at 274.447,129.27 h1.27
  text "18um" at 292.227,129.27 h1.27
  text "35um" at 319.278,129.27 h1.27
  text "70um" at 345.567,129.27 h1.27
  text "STRUCTURE:" at 266.573,126.222 h1.52
  text "REFER" at 292.227,126.222 h1.27
  text "AS PER DRAWING No." at 292.1,123.047 h1.27
  text "AS SHOWN" at 345.44,123.047 h1.27
  text "X" at 342.9,122.92 h1.52
  text "DRILLING:" at 266.573,120.253 h1.52
  text "VIEWED FROM:" at 271.526,117.967 h1.27
  text "COMPONENT SIDE" at 292.227,117.967 h1.14
  text "SOLDER SIDE" at 319.024,117.967 h1.14
  text "X" at 289.56,117.713 h1.52
  text "REFERENCE:" at 273.812,114.919 h1.27
  text "AS SHOWN" at 292.1,114.792 h1.14
  text "PATTERN MASTER LIST" at 319.151,114.792 h1.14
  text "X" at 342.9,114.792 h1.52
  text "NC_DRILL FILES" at 345.44,114.792 h1.14
  text "X" at 289.56,114.665 h1.52
  text "PTH MINIMUM COPPER THICKNESS:" at 279.654,111.871 h1.27
  text "20um" at 319.278,111.871 h1.27
  text "X" at 316.611,111.744 h1.52
  text "OTHER" at 345.44,111.744 h1.27
  text "NPTH:" at 280.162,108.823 h1.27
  text "TENTED" at 292.1,108.696 h1.14
  text "PADS REMOVED" at 319.151,108.696 h1.14
  text "REMOVE PADS" at 345.44,108.696 h1.14
  text "X" at 289.56,108.569 h1.52
  text "2nd DRILL" at 292.1,105.648 h1.14
  text "BOTH" at 319.151,105.648 h1.14
  text "AS SHOWN" at 331.47,105.648 h1.14
  text "NONE" at 345.44,105.648 h1.14
  text "BOARD FINISH:" at 266.573,102.727 h1.52
  text "X" at 289.56,102.6 h1.52
  text "ETCHING" at 292.1,102.6 h1.14
  text "REFER PATTERN MASTER LIST" at 319.151,102.6 h1.14
  text "LEGEND / SCREEN PRINT:" at 286.893,99.679 h1.27
  text "NONE" at 319.151,99.552 h1.14
  text "COMPONENT" at 331.47,99.552 h1.14
  text "SOLDER" at 345.44,99.552 h1.14
  text "X" at 316.611,99.425 h1.52
  text "COLOUR:" at 277.114,96.631 h1.27
  text "WHITE" at 292.1,96.504 h1.14
  text "YELLOW" at 319.151,96.504 h1.14
  text "OTHER" at 345.44,96.504 h1.14
  text "LIQUID PHOTOIMAGEABLE" at 292.1,93.456 h1.14
  text "SCREEN PRINT" at 331.47,93.456 h1.14
  text "MATTE" at 292.1,90.408 h1.14
  text "GLOSS" at 304.8,90.408 h1.14
  text "GREEN" at 319.151,90.408 h1.14
  text "BLUE" at 331.47,90.408 h1.14
  text "G/Y" at 345.44,90.408 h1.14
  text "OTHER" at 356.87,90.408 h1.14
  text "SOLDER MASK COLOUR:" at 266.573,87.487 h1.14
  text "BLACK" at 292.1,87.36 h1.14
  text "GREEN" at 304.8,87.36 h1.14
  text "YELLOW" at 319.151,87.36 h1.14
  text "BLUE" at 331.47,87.36 h1.14
  text "OTHER" at 345.44,87.36 h1.14
  text "X" at 289.433,87.233 h1.52
  text "TRACK FINISH:" at 266.573,84.439 h1.52
  text "X" at 289.56,84.312 h1.52
  text "SELECTIVE SOLDER (HASL)" at 292.1,84.312 h1.14
  text "REFLOW SOLDER" at 331.47,84.312 h1.14
  text "SELECTIVE GOLD" at 292.1,81.264 h1.14
  text "um  (AREA" at 319.151,81.264 h1.14
  text "sq. mm)" at 346.964,81.264 h1.14
  text "REFER PATTERN MASTER LIST" at 292.1,78.216 h1.14
  text "OTHER" at 331.47,78.216 h1.14
  text "EDGE BOARD" at 266.573,75.295 h1.52
  text "1.3um HARD GOLD OVER 5um     NICKEL / TIN-NICKEL" at 292.1,75.168 h1.14
  text "CONTACTS:" at 266.573,73.136 h1.52
  text "HARD FINISH GOLDE PLATE" at 292.1,72.12 h1.14
  text "OTHER" at 331.47,72.12 h1.14
  text "AS SHOWN" at 292.1,69.072 h1.14
  text "REFER" at 331.47,69.072 h1.14
  text "PROFILING:" at 266.573,66.024 h1.52
  text "AS DIMENSIONED, MEASURED AND CUT FROM SPECIFIED DATUM." at 292.1,66.024 h1.14
  text "X" at 289.56,65.897 h1.52
  text "REFER PCB BLANK DWG No." at 292.227,63.103 h1.27
  text "USE PROFILE / ROUTE TAPE SUPPLIED (REFER PATTERN MASTER LIST)" at 292.227,60.055 h1.27
  text "SQUARE CUT" at 292.227,57.007 h1.27
  text "N.C. ROUTE" at 310.007,57.007 h1.27
  text "V. SCORE" at 327.787,57.007 h1.27
  text "BLANK" at 345.567,57.007 h1.27
  text "ACCEPTABILITY:" at 266.573,54.34 h1.52
  text "MATERIALS AND WORKMANSHIP FOR ALL PRINTED WIRING BOARDS TO MEET" at 288.798,54.213 h1.27
  text "OR EXCEED THE REQUIREMENTS OF:" at 288.798,51.419 h1.27
  text "IPC-6011/12 AND IPC-A-600E" at 292.354,48.752 h1.27
  text "1" at 327.914,48.752 h1.27
  text "2" at 336.804,48.752 h1.27
  text "X" at 334.137,48.625 h1.52
  text "X" at 289.687,48.498 h1.52
  text "3" at 345.694,46.593 h1.27
  text "UL CERTIFICATION" at 292.354,45.704 h1.27
  text "AUSTEL" at 327.914,45.704 h1.27
  text "X" at 289.687,45.577 h1.52
  text "ML-P-55110F GRP" at 291.846,42.656 h1.02
  text "A" at 310.134,42.656 h1.27
  text "B" at 319.024,42.656 h1.27
  text "AS2546" at 327.914,42.656 h1.27
  text "OTHER" at 345.694,42.656 h1.27
  text "ADDITIONAL" at 266.573,39.735 h1.52
  text "NONE" at 292.354,39.481 h1.27
  text "SAMPLE PLAN" at 310.134,39.481 h1.27
  text "MIL-P-55110E SERIAL Nos. PER ORDER" at 327.914,39.481 h1.27
  text "REQUIREMENTS:" at 266.573,37.322 h1.52
  text "NONE" at 292.354,36.433 h1.27
  text "ML-P-55110F GRP" at 309.626,36.433 h1.02
  text "A" at 327.914,36.433 h1.27
  text "B" at 336.804,36.433 h1.27
  text "IPC CLASS:" at 342.773,36.433 h1.27
  text "1" at 358.267,36.433 h1.27
  text "2" at 364.617,36.433 h1.27
  text "3" at 370.967,36.433 h1.27
  text "QUALITY RELEASE REPORT" at 310.134,33.385 h1.27
  text "OTHER" at 350.647,33.385 h1.27
  text "PER ORDER" at 359.156,33.258 h1.27
  text "X" at 347.98,33.131 h1.52
  text "NONE" at 310.134,30.337 h1.27
  text "REQUIRED" at 327.914,30.337 h1.27
  text "PER ORDER" at 350.774,30.337 h1.27
  text "ELECTRICAL TEST:" at 266.573,30.21 h1.52
  text "X" at 325.247,30.21 h1.52
  text "NONE" at 310.134,27.289 h1.27
  text "1 SIDE" at 327.787,27.289 h1.14
  text "2 SIDES" at 338.963,27.289 h1.14
  text "MIN. PITCH" at 350.647,27.289 h1.27
  text "0.65mm" at 364.236,27.289 h1.27
  text "SURFACE MOUNT:" at 266.573,27.162 h1.52
  text "X" at 325.298,27.086 h1.52
  text "NONE" at 310.134,24.241 h1.27
  text "FOIL" at 327.914,24.241 h1.27
  text "LEGEND" at 339.344,24.241 h1.27
  text "REFER" at 350.647,24.241 h1.27
  text "MANUFACTURER'S ID/LOGO:" at 266.573,24.114 h1.52
  text "ISO9001/AS3901" at 313.944,21.193 h1.27
  text "NONE" at 350.647,21.193 h1.27
  text "MANUFACTURER'S ACCREDITATION:" at 266.573,21.066 h1.52
  text "X" at 311.277,21.066 h1.52
  text "PER ORDER" at 310.134,18.145 h1.27
  text "REFER" at 327.914,18.145 h1.27
  text "PACKAGING AND HANDLING:" at 266.573,18.018 h1.52
  text "X" at 307.467,17.891 h1.52
Sheet:
  drawing of 1882 lines, arcs and shapes, not listed
  text "1" at 8.67,258.318 h1.78
  text "2" at 57.709,258.318 h1.78
  text "3" at 106.968,258.318 h1.78
  text "4" at 156.261,258.318 h1.78
  text "5" at 205.537,258.318 h1.78
  text "6" at 254.559,258.318 h1.78
  text "7" at 304.089,258.318 h1.78
  text "8" at 353.111,258.318 h1.78
  text "A" at -13.462,224.333 h1.78
  text "A" at 375.158,224.333 h1.78
  text "B" at -13.462,153.721 h1.78
  text "B" at 375.158,153.721 h1.78
  text "C" at -13.462,83.109 h1.78
  text "C" at 375.158,83.109 h1.78
  text "D" at -13.462,13.005 h1.78
  text "D" at 375.158,13.005 h1.78
  text "ENGINEER:" at 260.223,12.827 h1.14
  text "TITLE:" at 298.323,12.827 h1.14
  text "PCB DESIGNER:" at 260.223,5.334 h1.14
  text "DATE:" at 260.223,-2.413 h1.14
  text "PART NO.:" at 298.323,-2.413 h1.14
  text "REV:" at 351.663,-2.413 h1.14
  text "Altium Limited" at 227.203,-4.953 h1.78
  text ".PRINT_DATE" at 261.493,-5.461 h1.78
  text "12a Rodborough Rd" at 227.203,-7.493 h1.78
  text "Frenchs Forest" at 227.203,-10.033 h1.78
  text "FILE NAME:" at 260.223,-10.033 h1.14
  text "DWG NO:" at 298.323,-10.033 h1.14
  text "SCALE:" at 351.663,-10.033 h1.14
  text "NSW 2086" at 227.203,-12.573 h1.78
  text ".PCB_FILE_NAME_NO_PATH" at 261.493,-13.081 h1.78
  text "1" at 8.67,-18.542 h1.78
  text "2" at 57.709,-18.542 h1.78
  text "3" at 106.968,-18.542 h1.78
  text "4" at 156.261,-18.542 h1.78
  text "5" at 205.537,-18.542 h1.78
  text "6" at 254.559,-18.542 h1.78
  text "7" at 304.089,-18.542 h1.78
  text "8" at 353.111,-18.542 h1.78
Drill Drawing:
  text ".Legend" at 4.953,-7.873 h0.75

## Text inside footprints (layer, text, board x,y; h text height)
J1: Top Overlay "1" at 12.11,3.045 h1.5 r90; Top Overlay "26" at 8.275,36.79 h1 r90
J2: Top Overlay "9" at 48.14,4.46 h1.5 r90; Top Overlay "10" at 54.84,3.76 h1.5 r90; Top Overlay "1" at 48.34,14.96 h1.5 r90; Top Overlay "2" at 54.84,14.86 h1.5 r90